# Altium PCB sz.1.PcbDoc
Units mil, origin at the board's own origin, x right, y up, seen from the top; angles counter-clockwise.
Board outline 3680.9 x 3025.08 mil, 2 copper layers (Top Layer, Bottom Layer); 37 components, 32 nets, 160 pads, 0 vias.
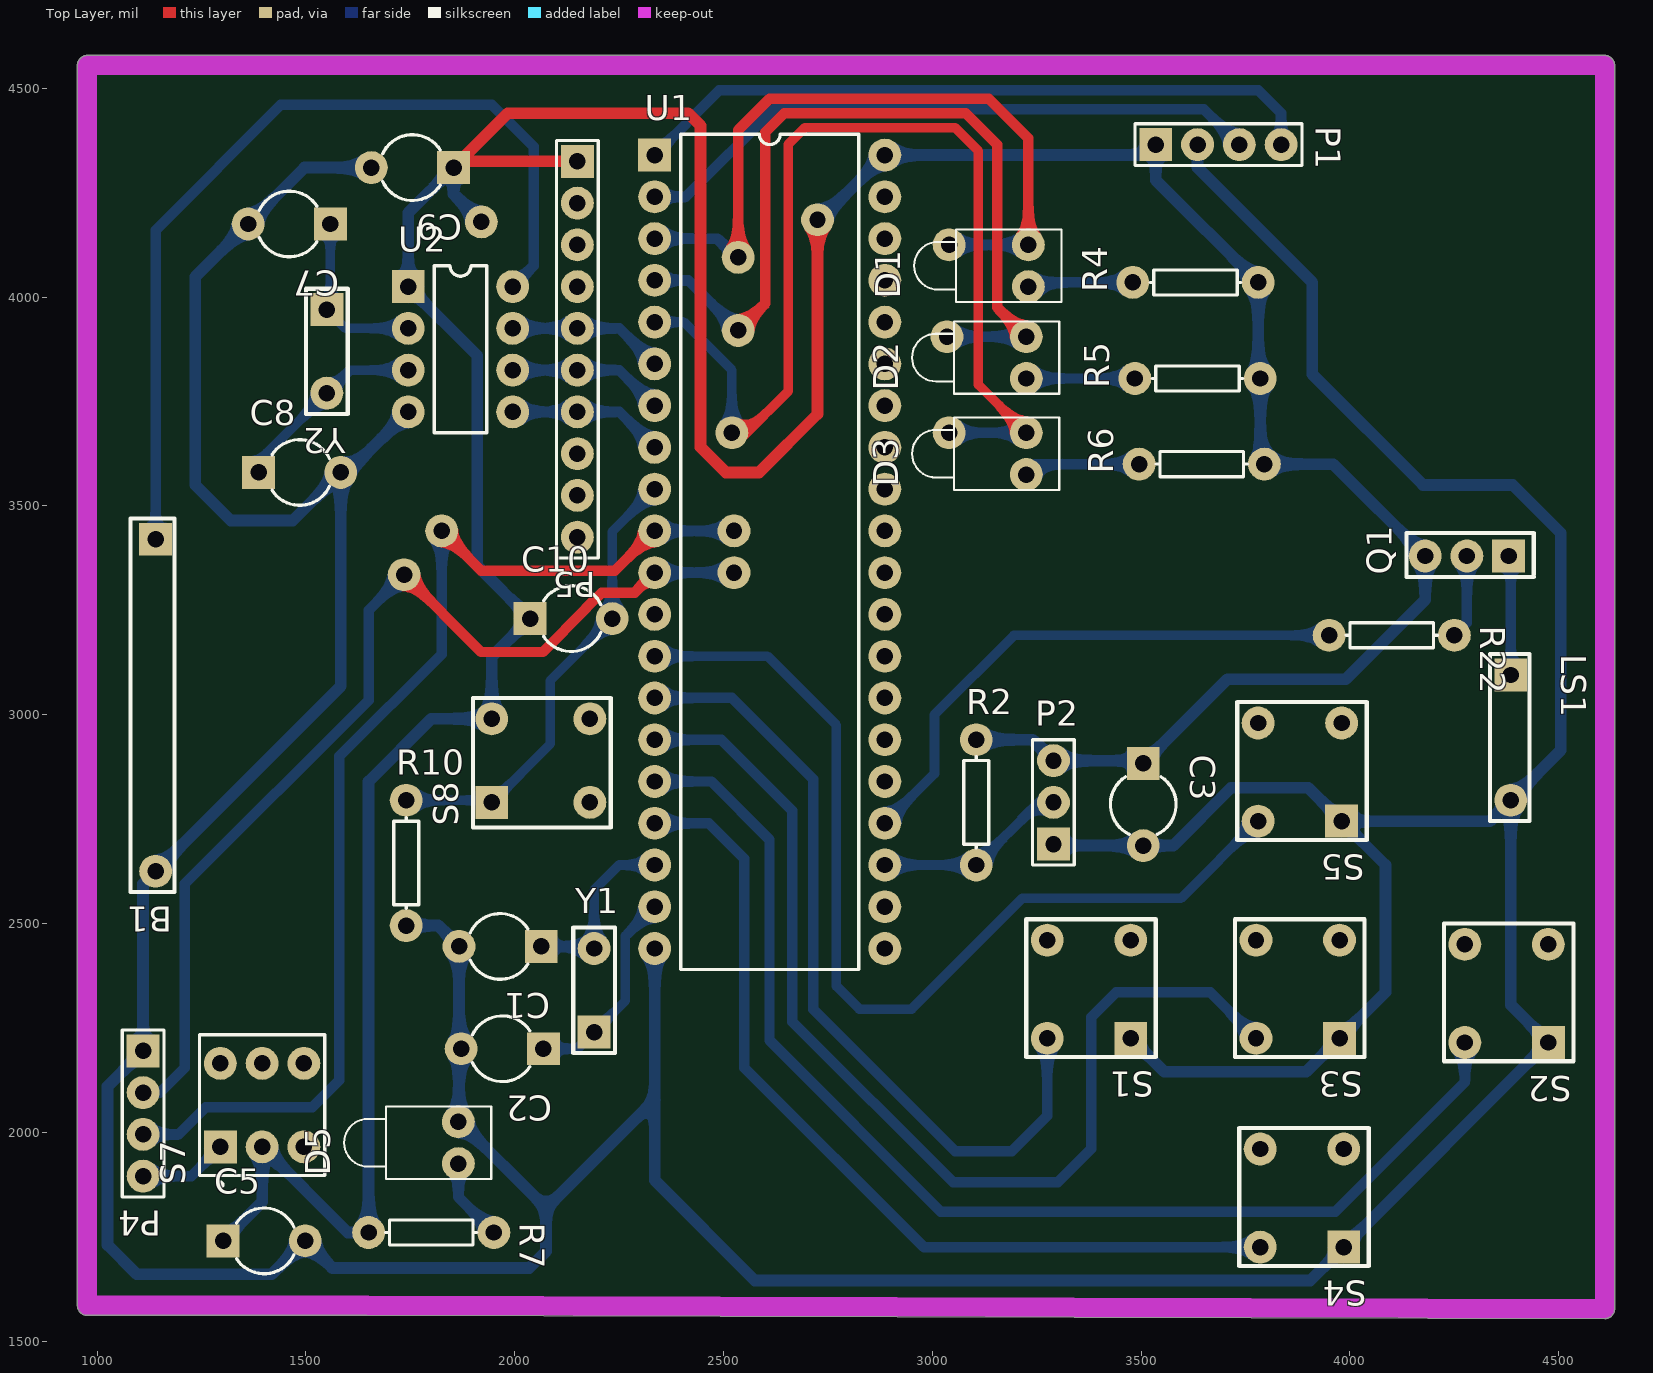
[diagram p0: Top Layer view]
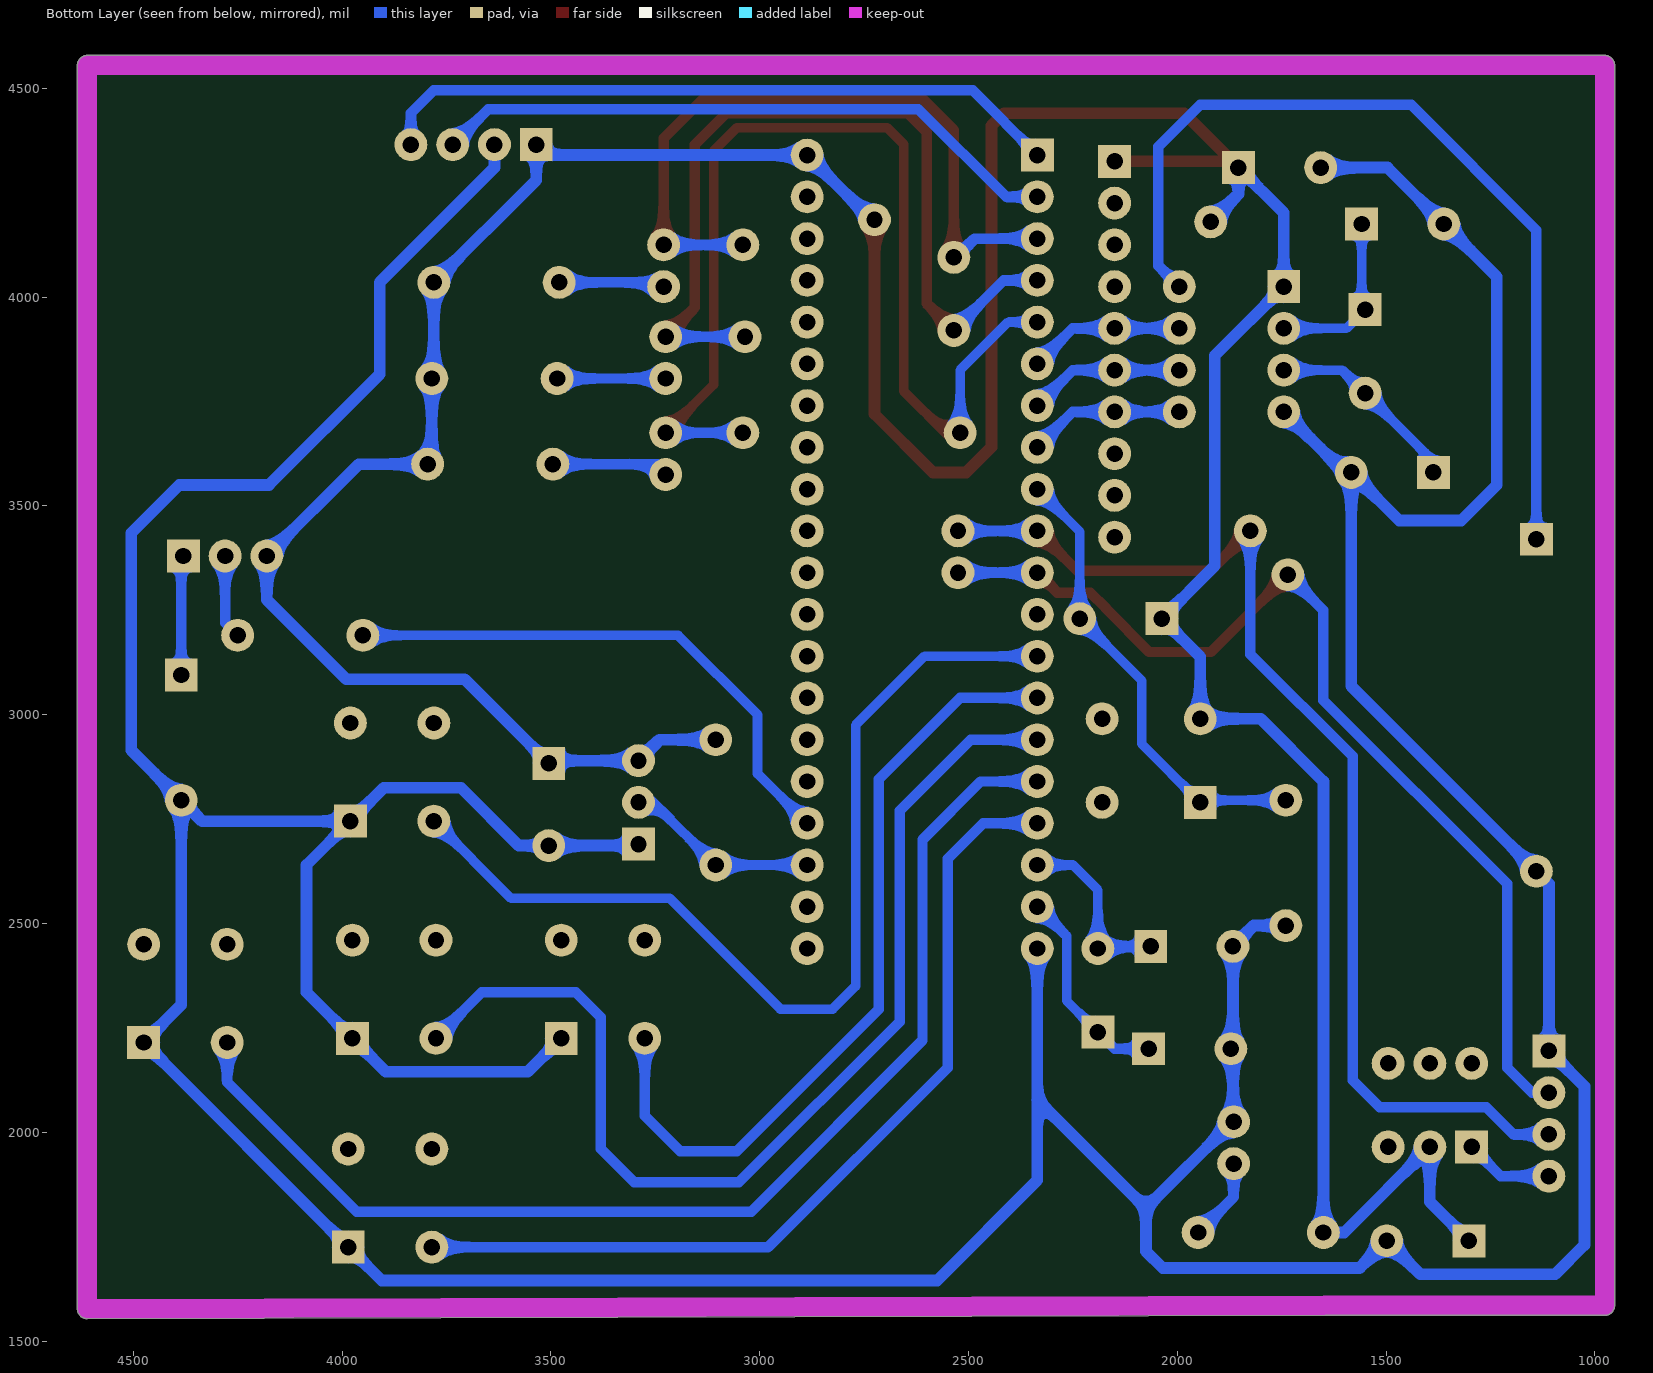
[diagram p1: Bottom Layer view, seen from below]

## Layer stack, top to bottom
Top Solder: solder mask 0.4, Solder Resist, Dk 3.5
Top Layer: signal copper 1.4
Dielectric 1: dielectric 12.6, FR-4, Dk 4.8
Bottom Layer: signal copper 1.4
Bottom Solder: solder mask 0.4, Solder Resist, Dk 3.5

## Board outline
976.38,1561.54 cw(c976.38,1585.17) 952.74,1585.17 952.74,4555 cw(c976.38,4555) 976.38,4578.64 4610,4578.64 cw(c4610,4555) 4633.64,4555 4633.64,1577.19 cw(c4610,1577.19) 4609.91,1553.56 4609.94,1553.56 4609.91,1553.56 1645.31,1561.54 1645.27,1561.54 1645.34,1561.54

## Design rules (kind name [scope] priority, off if disabled: settings)
Clearance [All] p1: gap=10
PolygonConnect [All] p1: connectstyle=Relief reliefconductorwidth=10 reliefentries=4 polygonreliefangle="90 Angle" airgapwidth=10
RoutingVias [All] p1: holewidth=28 width=50 viastyle="Through Hole" minholewidth=28 minwidth=50 maxholewidth=28 maxwidth=50
SolderMaskExpansion [All] p1: expansion=4
Width GND [InNet('GND')] p1: maxlimit=30 minlimit=28 preferedwidth=30
Width VCC [InNet('VCC')] p2: maxlimit=30 minlimit=28 preferedwidth=30
Width [All] p3: maxlimit=25 minlimit=23 preferedwidth=25
30 further rules are at their usual default settings.

## Components (designator, comment, footprint, x,y, rotation, side; value= is the part's Value field where it differs from the comment)
B1 "Battary" Battary 1140,3420 r270 top
C1 "20pf" CAPR5-4X5 1965,2445 r180 top
C2 "20pf" CAPR5-4X5 1970,2200 r180 top
C3 "75pf" CAPR5-4X5 3505,2785 r270 top
C5 "100UF" CAPR5-4X5 1400,1740 r0 top
C7 "30PF" CAPR5-4X5 1460,4175 r180 top
C8 "30PF" CAPR5-4X5 1485,3580 r0 top
C9 "100uf" CAPR5-4X5 1755,4310 r180 top
C10 "10uf" CAPR5-4X5 2135,3230 r0 top
D1 "绿" LED-1 3230,4075 r180 top
D2 "红" LED-1 3225,3855 r180 top
D3 "黄" LED-1 3225,3625 r180 top
D5 "LED1" LED-1 1865,1975 r180 top
LS1 "Bell" bell 4385,3095 r270 top
P1 "OLED" HDR1X4 3535,4365 r0 top
P2 "Header 3" HDR1X3 3290,2690 r90 top
P4 "USB" HDR1X4 1110,2195 r270 top
P5 "排阻" HDR1X10 2150,4325 r270 top
Q1 "PNP" PNP 4380,3380 r180 top
R2 "10K" AXIAL-0.3 3105,2790 r90 top
R4 "1K" AXIAL-0.3 3630,4035 r180 top
R5 "1K" AXIAL-0.3 3635,3805 r180 top
R6 "1K" AXIAL-0.3 3645,3600 r180 top
R7 "1K" AXIAL-0.3 1800,1760 r0 top
R10 "10k" AXIAL-0.3 1740,2645 r90 top
R22 "1K" AXIAL-0.3 4100,3190 r0 top
S1 "SW" SW 3475,2225 r180 top
S2 "SW" SW 4475,2215 r180 top
S3 "SW" SW 3975,2225 r180 top
S4 "SW" SW 3985,1725 r180 top
S5 "SW" SW 3980,2745 r180 top
S7 "SW-DPDT" DPDT-6 1395,2065 r90 top
S8 "SW" SW 1945,2790 r90 top
U1 "stc89c52" stc89c52 2335,4340 r0 top
U2 "DS1302" DS1302 1745,4025 r0 top
Y1 "11.0592" XTAL 2190,2240 r90 top
Y2 "38.768K" XTAL 1550,3970 r270 top

## Footprints (in the part's own frame and the unit in brackets; to place one, negate y for a bottom-side part, rotate by r counter-clockwise, add the part's x,y. Pads: shape width x height; smd on the part's side, far side on the other; paste and mask are expansions set on the pad)
AXIAL-0.3 [mm] "Axial Device, Thru-Hole; 2 Leads; 0.3 in Pin Spacing"
  round 2 hole 1: 1(-3.81,0) 2(3.81,0)
  silkscreen extent -2.77,-0.76 2.77,0.76
Battary [mm]
  rect 2x2 hole 1: 1(0,0)
  round 2 hole 1: 2(20.193,0)
  silkscreen extent -1.27,-1.52 21.46,1.14
bell [mm]
  rect 2x2 hole 1: 1(0,0)
  round 2 hole 1: 2(7.62,0)
  silkscreen extent -1.27,-1.27 8.89,1.14
CAPR5-4X5 [mm] "Capacitor; 2 Leads"
  rect 2x2 hole 1: 1(-2.5,0)
  round 2 hole 1: 2(2.5,0)
  silkscreen extent -1.69,-2 1.82,2
DPDT-6 [mm] "Switch; 6 Leads"
  rect 2x2 hole 1: 1(-2.54,2.54)
  round 2 hole 1: 2(-2.54,0) 3(-2.54,-2.54) 4(2.54,-2.54) 5(2.54,0) 6(2.54,2.54)
  silkscreen extent -4.96,-3.81 4.28,3.81
DS1302 [mm]
  rect 2x2 hole 1: 1(0,0)
  round 2 hole 1: 2(0,-2.54) 3(0,-5.08) 4(0,-7.62) 5(6.35,-7.62) 6(6.35,-5.08) 7(6.35,-2.54) 8(6.35,0)
  silkscreen extent 1.58,-8.89 4.77,1.27
HDR1X3 [mm] "Connector; Header; 3 Position"
  rect 2x2 hole 1: 1(0,0)
  round 2 hole 1: 2(2.54,0) 3(5.08,0)
  silkscreen extent -1.27,-1.27 6.35,1.27
HDR1X4 [mm] "Connector; Header; 4 Position"
  rect 2x2 hole 1: 1(0,0)
  round 2 hole 1: 2(2.54,0) 3(5.08,0) 4(7.62,0)
  silkscreen extent -1.27,-1.27 8.89,1.27
HDR1X10 [mm] "Connector; Header; 10 Position"
  rect 2x2 hole 1: 1(0,0)
  round 2 hole 1: 2(2.54,0) 3(5.08,0) 4(7.62,0) 5(10.16,0) 6(12.7,0) 7(15.24,0) 8(17.78,0) 9(20.32,0) 10(22.86,0)
  silkscreen extent -1.27,-1.27 24.13,1.27
LED-1 [mm] "LED; 2 Leads"
  round 2 hole 1: 1(0,1.27) 2(0,-1.27)
  silkscreen extent -2,-2.2 6.95,2.2
PNP [mm]
  rect 2x2 hole 1: 1(0,0)
  round 2 hole 1: 2(2.54,0) 3(5.08,0)
  silkscreen extent -1.52,-1.4 6.22,1.27
stc89c52 [mm]
  rect 2x2 hole 1: 1(0,0)
  round 2 hole 1: 2(0,-2.54) 3(0,-5.08) 4(0,-7.62) 5(0,-10.16) 6(0,-12.7) 7(0,-15.24) 8(0,-17.78) 9(0,-20.32) 10(0,-22.86) 11(0,-25.4) 12(0,-27.94) 13(0,-30.48) 14(0,-33.02) 15(0,-35.56) 16(0,-38.1) 17(0,-40.64) 18(0,-43.18) 19(0,-45.72) 20(0,-48.26) 21(14,-48.26) 22(14,-45.72) 23(14,-43.18) 24(14,-40.64) 25(14,-38.1) 26(14,-35.56) 27(14,-33.02) 28(14,-30.48) 29(14,-27.94) 30(14,-25.4) 31(14,-22.86) 32(14,-20.32) 33(14,-17.78) 34(14,-15.24) 35(14,-12.7) 36(14,-10.16) 37(14,-7.62) 38(14,-5.08) 39(14,-2.54) 40(14,0)
  silkscreen extent 1.58,-49.53 12.42,1.27
SW [mm]
  rect 2x2 hole 1: 1(0,0)
  round 2 hole 1: 2(5.08,0) 3(0,-5.969) 4(5.08,-5.969)
  silkscreen extent -1.52,-7.24 6.35,1.14
XTAL [mm]
  rect 2x2 hole 1: 1(0,0)
  round 2 hole 1: 2(5.08,0)
  silkscreen extent -1.27,-1.27 6.35,1.27

## Part data
C1 C2: library part Cap2
C3 C5 C7 C8 C9 C10: library part Cap2, "Capacitor"
D1 D2 D3: library part LED1, "Typical RED GaAs LED"
D5: "Typical RED GaAs LED"
P1 P4: library part "Header 4", "Header, 4-Pin"
P2: "Header, 3-Pin"
P5: library part "Header 10", "Header, 10-Pin"
R2 R4 R5 R6 R7 R10 R22: library part Res1, "Resistor"
S7: "Double-Pole, Double-Throw Switch"
Y1 Y2: library part XTAL

## Free pads (board coordinates)
  round 78.74 hole 39.37: 2(1735,3335) 4(2525,3440) 5(2525,3340) 6(1825,3440) 7(1920,4180) 8(2725,4185) 9(2535,4095) 10(2535,3920) 11(2520,3675) 12(3040,4125) 13(3035,3905) 14(3040,3675)

## Nets (pads, with @x,y where several pads share a name; then routed paths per layer and width w, separated by ;. In a path a pad name is that pad's centre, name@x,y a point inside that pad or via, vN(x,y) a via of type N, cw(c..) or ccw(c..) an arc to the next point about the centre after c; other vN are vias at no path point)
A1: P2.2 R2.1 U1.23 | length 466
  Bottom Layer w23: U1.23 R2.1 3255,2790 P2.2
B1: P4.2 pad.2 pad.5 U1.11 | length 2488.4
  Top Layer w25: pad.2 1920,3150 2067.13,3150 2171.56,3254.42 2171.56,3255.63 2207.8,3291.87 2286.87,3291.87 U1.11
  Bottom Layer w25: P4.2 1150,2095 1210,2155 1210,2595 1650,3035 1650,3250 pad.2 ; U1.11 pad.5 pad.5@2505,3340
B2: P4.3 pad.4 pad.6 U1.10 | length 2719
  Top Layer w25: pad.6 1920,3345 2240,3345 U1.10
  Bottom Layer w25: P4.3 1195,1995 1260,2060 1515,2060 1580,2125 1580,2900 1825,3145 pad.6 ; U1.10 pad.4
C1: R22.1 U1.24 | length 1332.9
  Bottom Layer w23: U1.24 3005,2858.82 3005,3000 3195,3190 R22.1
F: C10.2 R10.2 S8.1 U1.9 | length 1118.6
  Bottom Layer w23: R10.2 1940,2795 S8.1 2085,2930 2085,3081.57 C10.2 2233.43,3438.43 U1.9
GND: B1.2 C1.2 C2.2 C3.2 C5.2 C7.2 C8.2 C9.2 D5.2 LS1.2 P1.2 P2.1 P4.1 R10.1 S1.1 S2.1 S3.1 S4.1 S5.1 U1.20 U2.4 | length 14386.2
  Bottom Layer w28: C9.2 1496.57,4310 C7.2 1235,4048.43 1235,3550 1320,3465 1468.43,3465 C8.2 ; R10.1 1816.58,2495 C1.2 1866.57,2026.57 2075,1818.15 ; U2.4 1600,3580 C8.2 ; U1.20 2335,2078.15 ; P2.1 3293.43,2686.57 C3.2 3576.57,2686.57 3715,2825 3900,2825 S5.1 ; S1.1 3555,2145 3895,2145 S3.1 4085,2335 4085,2640 S5.1 ; P1.2 3635,4310 3910,4035 3910,3815 4175,3550 4390,3550 4505,3435 4505,2915 LS1.2 ; C8.2 1583.43,3068.43 B1.2 1110,2595 P4.1 1025,2110 1025,1730 1095,1660 1418.43,1660 C5.2 1563.42,1675 2035,1675 2075,1715 2075,1818.15 ; 2075,1818.15 2335,2078.15 ; 2335,2078.15 2335,1885 2575,1645 3905,1645 S4.1 S2.1 4385,2305 LS1.2 ; S5.1 4335,2745 LS1.2
K1: S5.2 U1.13 | length 2347.5
  Bottom Layer w23: U1.13 2605,3140 2770,2975 2770,2350 2825,2295 2950,2295 3215,2560 3595,2560 S5.2
K2: S1.2 U1.14 | length 1931.8
  Bottom Layer w25: U1.14 2520,3040 2715,2845 2715,2295 3055,1955 3190,1955 3275,2040 S1.2
K3: S3.2 U1.15 | length 2593.4
  Bottom Layer w25: U1.15 2495,2940 2665,2770 2665,2265 3050,1880 3300,1880 3380,1960 3380,2275 3440,2335 3665,2335 S3.2
K4: S2.2 U1.16 | length 2871.2
  Bottom Layer w25: U1.16 2470,2840 2610,2700 2610,2220 3020,1810 3965,1810 4275,2120 S2.2
K5: S4.2 U1.17 | length 2163.3
  Bottom Layer w25: U1.17 2465,2740 2550,2655 2550,2155 2980,1725 S4.2
L1: D1.2 pad.9 pad.12 U1.3 | length 1692.8
  Top Layer w25: pad.9 2535,4400 2610,4475 3135,4475 3230,4380 D1.2
  Bottom Layer w25: U1.3 2485,4140 pad.9@2515,4110 ; pad.12@3055,4125 D1.2
L2: D2.2 pad.10 pad.13 U1.4 | length 2025.3
  Top Layer w25: pad.10 2600,3985 2600,4395 2645,4440 3080,4440 3155,4365 3155,3975 D2.2
  Bottom Layer w25: U1.4 2415,4040 pad.10 ; pad.13@3045,3905 D2.2
L3: D3.2 pad.11 pad.14 U1.5 | length 2576.6
  Top Layer w23: pad.11 2555,3675 2655,3775 2655,4366 2694,4405 3055,4405 3110,4350 3110,3790 D3.2
  Bottom Layer w23: U1.5 2405,3940 2520,3825 pad.11 ; pad.14@3015,3675 pad.14 D3.2
NetB1_1: B1.1 U2.8 | length 2166.4
  Bottom Layer w25: B1.1 1140,4160 1440,4460 1945,4460 2045,4360 2045,4075 U2.8
NetC1_1: C1.1 U1.18 Y1.2 | length 438.5
  Bottom Layer w23: Y1.2 2190,2580 2250,2640 U1.18
  Bottom Layer w25: C1.1 2185,2445 Y1.2
NetC2_1: C2.1 U1.19 Y1.1 | length 498.2
  Bottom Layer w23: Y1.1 2265,2315 2265,2470 U1.19
  Bottom Layer w25: C2.1 2150,2200 Y1.1
NetC7_1: C7.1 U2.2 Y2.1 | length 422.1
  Bottom Layer w23: C7.1 1558.43,3978.43 Y2.1 1595,3925 U2.2
NetC8_1: C8.1 U2.3 Y2.2 | length 475.5
  Bottom Layer w23: C8.1 1386.57,3606.57 Y2.2 1605,3825 U2.3
NetD1_1: D1.1 R4.2 | length 240
  Bottom Layer w25: D1.1@3240,4035 R4.2
NetD2_1: D2.1 R5.2 | length 260
  Bottom Layer w25: D2.1 R5.2
NetD3_1: D3.1 R6.2 | length 280.4
  Bottom Layer w25: D3.1 3250,3600 R6.2
NetD5_1: D5.1 R7.2 | length 200.2
  Bottom Layer w25: D5.1 1865,1845 R7.2
NetLS1_1: LS1.1 Q1.1 | length 287.1
  Bottom Layer w25: Q1.1 4385,3375 LS1.1
NetP4_4: P4.4 S7.1 | length 214
  Bottom Layer w25: P4.4 1225,1895 S7.1
NetQ1_2: Q1.2 R22.2 | length 202.4
  Bottom Layer w25: R22.2 4280,3220 Q1.2
O1: P1.3 U1.2 | length 1522.2
  Bottom Layer w25: U1.2 2410,4240 2620,4450 3650,4450 P1.3
O2: P1.4 U1.1 | length 1662
  Bottom Layer w25: U1.1 2490,4495 3780,4495 3835,4440 P1.4
S1: P5.5 U1.6 U2.7 | length 375.2
  Bottom Layer w25: U2.7 P5.5 2250,3925 U1.6
S2: P5.6 U1.7 U2.6 | length 375.2
  Bottom Layer w25: U2.6 P5.6 2250,3825 U1.7
S3: P5.7 U1.8 U2.5 | length 375.2
  Bottom Layer w25: U2.5 P5.7 2250,3725 U1.8
VCC: C3.1 C5.1 C9.1 C10.1 P1.1 P2.3 P5.1 pad.7 pad.8 Q1.3 R2.2 R4.1 R5.1 R6.1 R7.1 S7.2 S8.2 U1.40 U2.1 | length 9879.4
  Top Layer w28: C9.1 C9.1@1868.43,4325 ; P5.1 C9.1@1868.43,4325 ; pad.8 2725,3720 2585,3580 2505,3580 2445,3640 2445,4410 2415,4440 1983.43,4440 C9.1@1868.43,4325
  Bottom Layer w28: C5.1 1395,1833.43 S7.2 1600,1760 R7.1 1650,2840 1800,2990 S8.2 1945,3138.43 C10.1 1910,3356.57 1910,3860 U2.1 1745,4201.57 C9.1 1853.43,4246.57 pad.7 ; pad.8@2710,4170 2716.18,4170 U1.40 3510,4340 P1.1 3535,4280 R4.1 3780,3810 R5.1 3785,3610 R6.1 3960,3600 Q1.3 4180,3275 3990,3085 3706.57,3085 C3.1 3498.43,2890 P2.3 3240,2940 R2.2
pads on no net: P5.2 P5.3 P5.4 P5.8 P5.9 P5.10 S1.3 S1.4 S2.3 S2.4 S3.3 S3.4 S4.3 S4.4 S5.3 S5.4 S7.3 S7.4 S7.5 S7.6 S8.3 S8.4 U1.12 U1.21 U1.22 U1.25 U1.26 U1.27 U1.28 U1.29 U1.30 U1.31 U1.32 U1.33 U1.34 U1.35 U1.36 U1.37 U1.38 U1.39

## Keep-outs
Keep-Out Layer:
  lines w47.24: 976.38,1585.17 976.38,4555 4610,4555 4610,1577.19 1645.34,1585.17 976.38,1585.17